# Altium PCB Wings_SMD_Breakout_0.1c.PcbDoc (part 2 of 2)
Units mm, origin at the board's own origin, x right, y up, seen from the top; angles counter-clockwise.
Board outline 50.8 x 30 mm, 2 copper layers (Top Layer, Bottom Layer), stack 1.569 mm thick; 53 components, 56 nets, 200 pads, 251 vias.
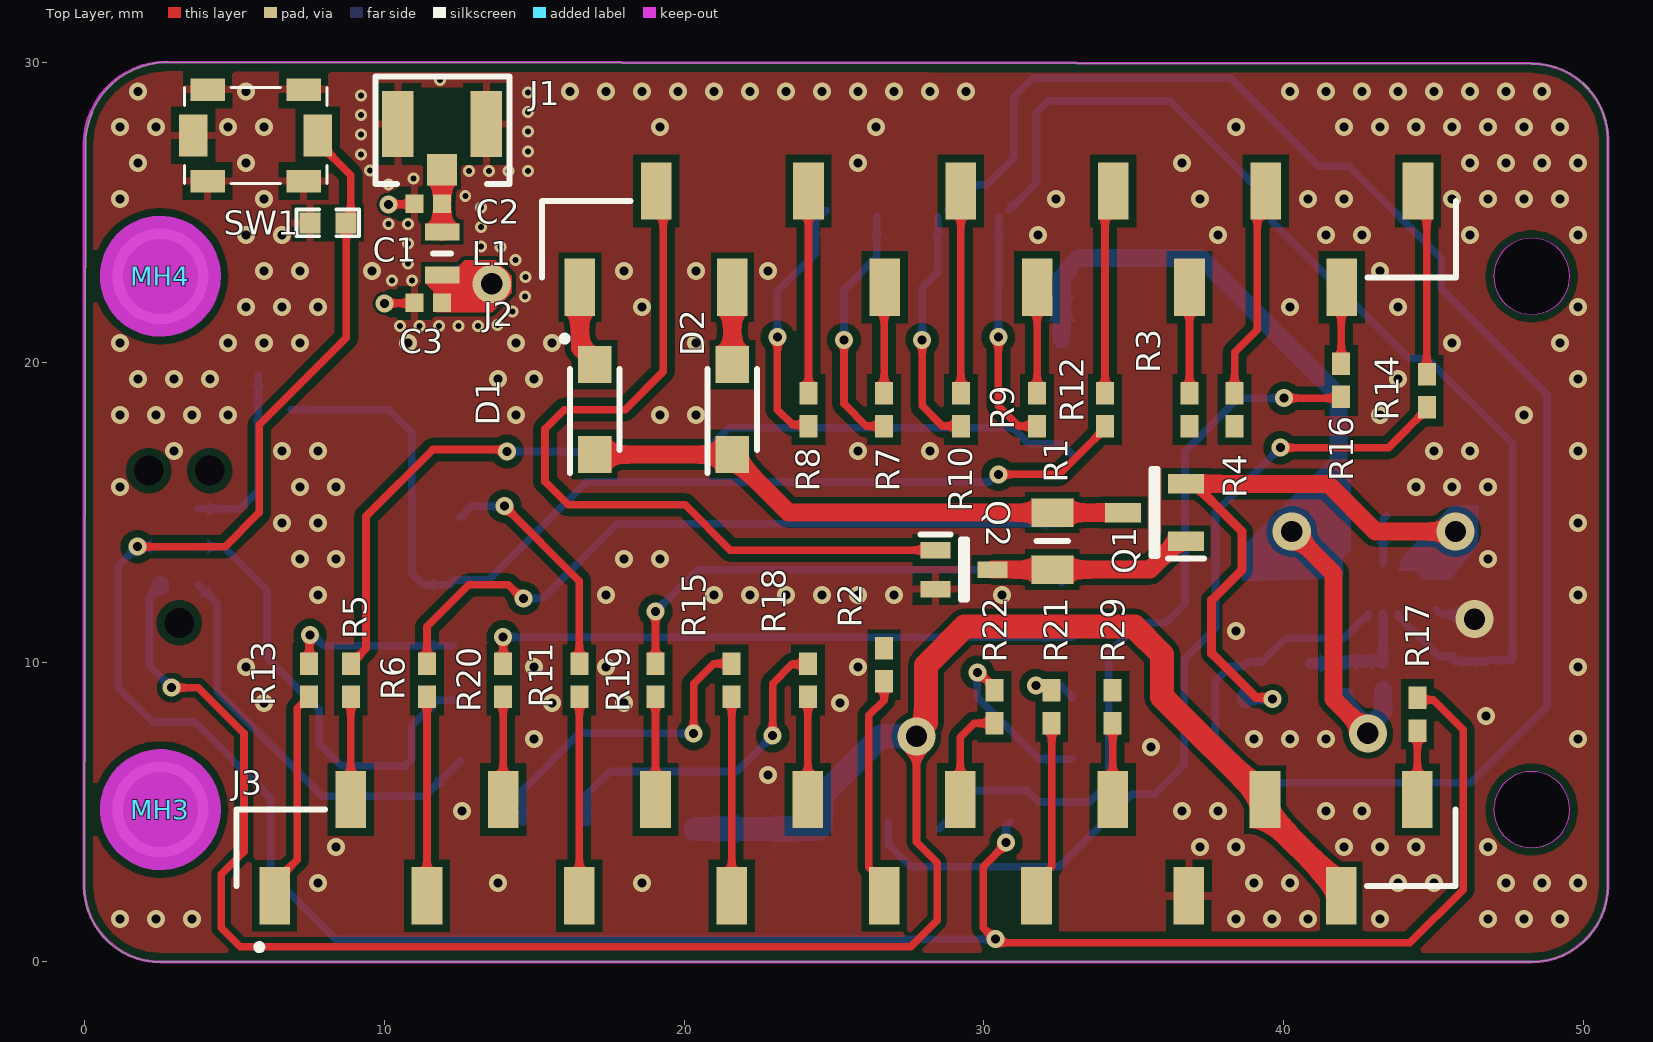
[diagram p0: Top Layer view]

## Via types
v1: diameter 0.6, hole 0.3, Top Layer to Bottom Layer, tented both sides, 183 vias
v2: diameter 0.4, hole 0.2, Top Layer to Bottom Layer, tented both sides, 29 vias
v3: diameter 0.6, hole 0.3, Top Layer to Bottom Layer, tented bottom, 14 vias
v4: diameter 0.6, hole 0.3, Top Layer to Bottom Layer, tented top, 11 vias
v5: diameter 0.4, hole 0.2, Top Layer to Bottom Layer, tented top, 8 vias
v6: diameter 1.27, hole 0.711, Top Layer to Bottom Layer, tented top, 3 vias
v7: diameter 1.27, hole 0.711, Top Layer to Bottom Layer, tented bottom, 2 vias
v8: diameter 1.27, hole 0.711, Top Layer to Bottom Layer, tented both sides, 1 vias

## Nets (pads, with @x,y where several pads share a name; then routed paths per layer and width w, separated by ;. In a path a pad name is that pad's centre, name@x,y a point inside that pad or via, vN(x,y) a via of type N, cw(c..) or ccw(c..) an arc to the next point about the centre after c; other vN are vias at no path point) (continued)
VPA_PGOOD: (continued)
  Bottom Layer w0.254: v3(27.94,20.741) 27.94,22.479 28.46,22.999 SMD1.10 ; SMD1.10@28.801,25.079 28.933,25.211 29.054,25.211 29.75,25.908 30.099,25.908 30.988,26.797 30.988,28.829 31.623,29.464 38.227,29.464 41.163,26.528 42.181,26.528 45.245,23.464 45.245,22.446 48.768,18.923 48.768,8.509 46.228,5.969 39.243,5.969 37.706,7.506 37.706,9.352 38.203,9.849 38.636,9.849 38.793,10.006 39.267,10.006 40.056,10.795 41.994,10.795 42.697,11.498 42.784,11.498 42.807,11.521 IC1.6
VPA_VDD: C6.2 C7.2 L2.2 R26.2 SMD1.7 SMD1.8 | length 28.4
  Top Layer w0.6: v6(40.259,14.351) 41.656,12.954 41.656,8.763 v6(42.799,7.62)
  Bottom Layer w0.6: SMD1.7 SMD1.8 32.792,22.999 32.792,23.125 33.143,23.476 37.23,23.476 41.825,18.881 L2.2 ; C7.2@41.498,13.177 C7.2 ; R26.2 42.037,8.563 v6@42.799,7.801 ; v6(42.799,7.62) v6@42.799,7.801 ; C6.2 43.307,8.309 v6@42.799,7.801
pads on no net: J4.H1 J4.H2 J4.H3 MH3.MH3 MH4.MH4 R2.1 R3.1 R4.1 R29.1

## Polygon pours and split planes (outlines as drawn)
GND on Top Layer "GND_L01_P000" (solid, remove dead copper, pour order 0): 0,0 0.127,-0.127 50.927,-0.127 50.927,30.099 50.8,30.226 0,30.226
GND on Bottom Layer "GND_L02_P001" (solid, remove dead copper, pour order 1): 0,0 0.127,-0.127 50.927,-0.127 50.927,30.099 50.8,30.226 0,30.226

## Keep-outs
Keep-Out Layer:
  lines w0.1: 50.8,27.41 ccw(c48.26,27.41) 48.26,29.95 2.754,30 ccw(c2.754,27.246) 0,27.246 0,2.54 ; 50.8,27.432 50.8,2.54 ; 0,2.54 ccw(c2.54,2.54) 2.54,0 ; 0,2.54 ccw(c2.54,2.54) 2.54,0 ; 2.54,0 48.26,0 ; 2.54,0 48.26,0 ; 48.26,0 ccw(c48.26,2.54) 50.8,2.54 ; 48.26,0 ccw(c48.26,2.54) 50.8,2.54

## Other copper
Top Layer:
  region net NetC3_1: 11.737,21.663 11.739,21.661 13.599,21.661 14.254,22.316 14.254,22.874 13.728,23.4 13.72,23.392 12.694,23.392 12.126,22.824 11.572,22.824 11.367,22.628 11.65,22.338 11.65,21.671
Bottom Layer:
  region net VDD: 43.939,13.51 43.807,13.047 44.338,13.047 44.62,12.765 45.567,12.765 46.482,13.908 46.482,15.202 45.567,15.202
  region net VPA_VDD: 41.967,13.48 42.227,13.74 42.227,16.066 41.529,16.764 38.608,13.843 38.608,12.7 41.848,12.775 41.971,12.848

## Silkscreen, mask and mechanical layers (free items; w line width, h text height)
Mechanical 1:
  drawing of 243 lines, arcs and shapes, not listed
  text "Layer" at 62.42,28.384 h1.52
  text "Name" at 72.832,28.384 h1.52
  text "Material" at 106.605,28.384 h1.52
  text "Thickness" at 121.841,28.384 h1.52
  text "Constant" at 138.347,28.384 h1.52
  text "Board Layer Stack" at 152.821,28.384 h1.52
  text "Top Overlay" at 72.832,25.336 h1.52
  text "Top Solder" at 72.832,22.288 h1.52
  text "SM-001" at 106.605,22.288 h1.52
  text "1,00mil" at 121.841,22.288 h1.52
  text "4" at 138.347,22.288 h1.52
  text "Top Surface Finish" at 72.832,19.241 h1.52
  text "PbSn" at 106.605,19.241 h1.52
  text "0,79mil" at 121.841,19.241 h1.52
  text "1" at 62.42,16.192 h1.52
  text "Top Layer" at 72.832,16.192 h1.52
  text "CF-004" at 106.605,16.192 h1.52
  text "1,38mil" at 121.841,16.192 h1.52
  text "Dielectric 1" at 72.832,13.144 h1.52
  text "Core-043" at 106.605,13.144 h1.52
  text "59,00mil" at 121.841,13.144 h1.52
  text "4.3" at 138.347,13.144 h1.52
  text "2" at 62.42,10.096 h1.52
  text "Bottom Layer" at 72.832,10.096 h1.52
  text "CF-004" at 106.605,10.096 h1.52
  text "1,38mil" at 121.841,10.096 h1.52
  text "Bottom Surface Finish" at 72.832,7.048 h1.52
  text "PbSn" at 106.605,7.048 h1.52
  text "0,79mil" at 121.841,7.048 h1.52
  text "Bottom Solder" at 72.832,4 h1.52
  text "SM-001" at 106.605,4 h1.52
  text "1,00mil" at 121.841,4 h1.52
  text "4" at 138.347,4 h1.52
  text "Bottom Overlay" at 72.832,0.953 h1.52
Mechanical 15:
  lines w0.254: 4.826,2.54 1.524,2.54 0,4.064 0,23.876 1.524,25.4 14.986,25.4 ; 45.974,2.54 49.403,2.54 50.8,3.937 50.8,24.003 49.403,25.4 45.974,25.4
Drill Drawing:
  circle w0.254: c62.119,48.027 r0.847
  lines w0.254: 61.272,35.75 62.966,35.75 62.966,37.444 61.272,37.444 61.272,35.75 ; 61.272,39.984 61.696,39.984 61.696,39.56 62.542,39.56 62.542,39.984 62.966,39.984 62.966,40.83 62.542,40.83 62.542,41.254 61.696,41.254 61.696,40.83 61.272,40.83 61.272,39.984 ; 61.272,43.37 62.119,43.794 62.966,43.37 62.542,44.217 62.966,45.064 62.119,44.64 61.272,45.064 61.696,44.217 61.272,43.37 ; 61.272,51.414 61.696,51.414 62.119,50.99 62.542,51.414 62.966,51.414 62.542,51.837 62.966,52.26 62.542,52.26 62.119,52.684 61.696,52.26 61.272,52.26 61.696,51.837 61.272,51.414 ; 61.272,56.494 62.966,56.494 62.119,54.8 61.272,56.494
  lines w0.381: 59.753,34.608 328.767,34.608 ; 59.753,57.468 328.767,57.468 ; 73.746,30.797 73.746,61.277 ; 88.982,30.797 88.982,61.277 ; 118.183,30.797 118.183,61.277 ; 131.032,30.797 131.032,61.277 ; 149.671,30.797 149.671,61.277 ; 187.76,30.797 187.76,61.277 ; 202.742,30.797 202.742,61.277 ; 221.685,30.797 221.685,61.277 ; 238.191,30.797 238.191,61.277 ; 259.876,30.797 259.876,61.277 ; 293.75,30.797 293.75,61.277 ; 59.753,30.797 328.767,30.797 328.767,61.277 59.753,61.277 59.753,30.797
  text "Symbol" at 62.039,58.61 h1.83
  text "Count" at 74.889,58.61 h1.83
  text "Hole Size" at 90.125,58.61 h1.83
  text "Plated" at 119.326,58.61 h1.83
  text "Hole Type" at 132.175,58.61 h1.83
  text "Drill Layer Pair" at 150.814,58.61 h1.83
  text "Via/Pad" at 188.903,58.61 h1.83
  text "Pad Shape" at 203.885,58.61 h1.83
  text "Template" at 222.828,58.61 h1.83
  text "Description" at 239.334,58.61 h1.83
  text "Hole Tolerance (+)" at 261.019,58.61 h1.83
  text "Hole Tolerance (-)" at 294.893,58.61 h1.83
  text "2" at 74.889,54.8 h1.52
  text "2.500mm (98.43mil)" at 90.125,54.8 h1.52
  text "PTH" at 119.326,54.8 h1.52
  text "Round" at 132.175,54.8 h1.52
  text "Top Layer - Bottom Layer" at 150.814,54.8 h1.52
  text "Pad" at 188.903,54.8 h1.52
  text "Rounded" at 203.885,54.8 h1.52
  text "(Mixed)" at 222.828,54.8 h1.52
  text "2" at 74.889,50.99 h1.52
  text "2.540mm (100.00mil)" at 90.125,50.99 h1.52
  text "NPTH" at 119.326,50.99 h1.52
  text "Round" at 132.175,50.99 h1.52
  text "Top Layer - Bottom Layer" at 150.814,50.99 h1.52
  text "Pad" at 188.903,50.99 h1.52
  text "Rounded" at 203.885,50.99 h1.52
  text "c254hn254" at 222.828,50.99 h1.52
  text "3" at 74.889,47.18 h1.52
  text "0.991mm (39.02mil)" at 90.125,47.18 h1.52
  text "NPTH" at 119.326,47.18 h1.52
  text "Round" at 132.175,47.18 h1.52
  text "Top Layer - Bottom Layer" at 150.814,47.18 h1.52
  text "Pad" at 188.903,47.18 h1.52
  text "Rounded" at 203.885,47.18 h1.52
  text "c65hn99" at 222.828,47.18 h1.52
  text "6" at 74.889,43.37 h1.52
  text "0.711mm (27.99mil)" at 90.125,43.37 h1.52
  text "PTH" at 119.326,43.37 h1.52
  text "Round" at 132.175,43.37 h1.52
  text "Top Layer - Bottom Layer" at 150.814,43.37 h1.52
  text "Via" at 188.903,43.37 h1.52
  text "Rounded" at 203.885,43.37 h1.52
  text "(Mixed)" at 222.828,43.37 h1.52
  text "37" at 74.889,39.56 h1.52
  text "0.200mm (7.87mil)" at 90.125,39.56 h1.52
  text "PTH" at 119.326,39.56 h1.52
  text "Round" at 132.175,39.56 h1.52
  text "Top Layer - Bottom Layer" at 150.814,39.56 h1.52
  text "Via" at 188.903,39.56 h1.52
  text "Rounded" at 203.885,39.56 h1.52
  text "(Mixed)" at 222.828,39.56 h1.52
  text "208" at 74.889,35.75 h1.52
  text "0.300mm (11.81mil)" at 90.125,35.75 h1.52
  text "PTH" at 119.326,35.75 h1.52
  text "Round" at 132.175,35.75 h1.52
  text "Top Layer - Bottom Layer" at 150.814,35.75 h1.52
  text "Via" at 188.903,35.75 h1.52
  text "Rounded" at 203.885,35.75 h1.52
  text "(Mixed)" at 222.828,35.75 h1.52
  text "258 Total" at 74.889,31.941 h1.52